# EAGLE board mkr1000_backpack (EAGLE 9.1.0)
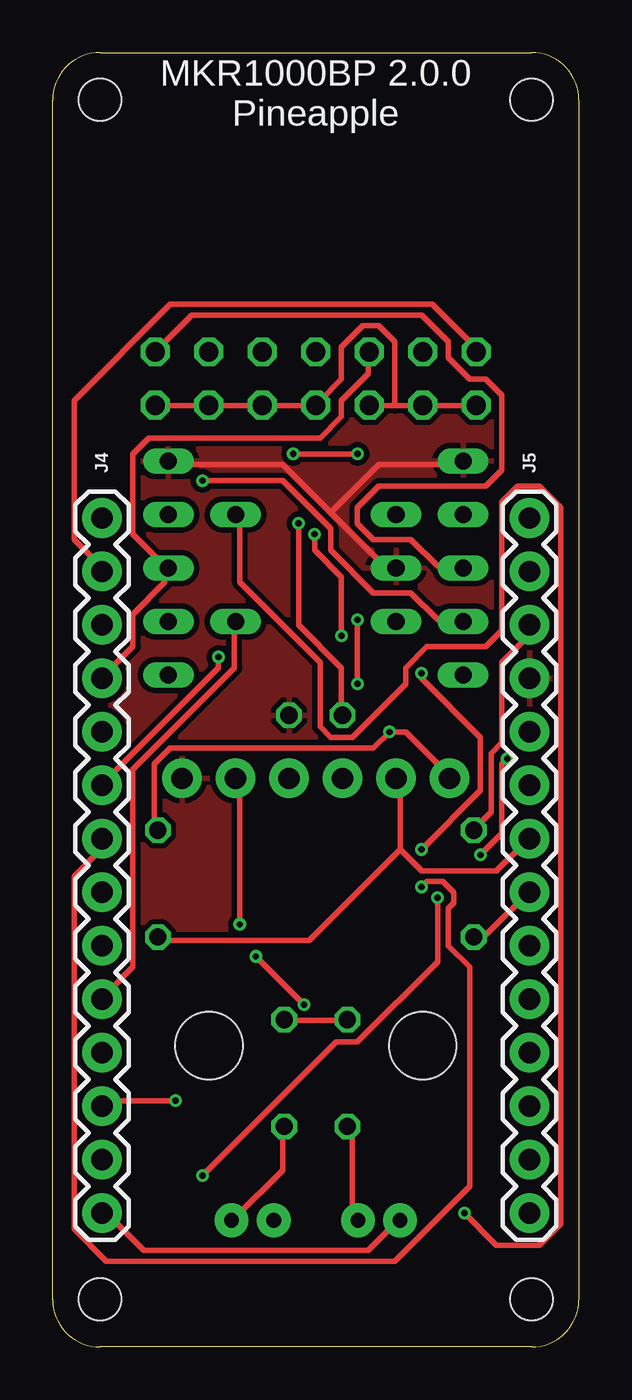
[diagram p0: board, top side]
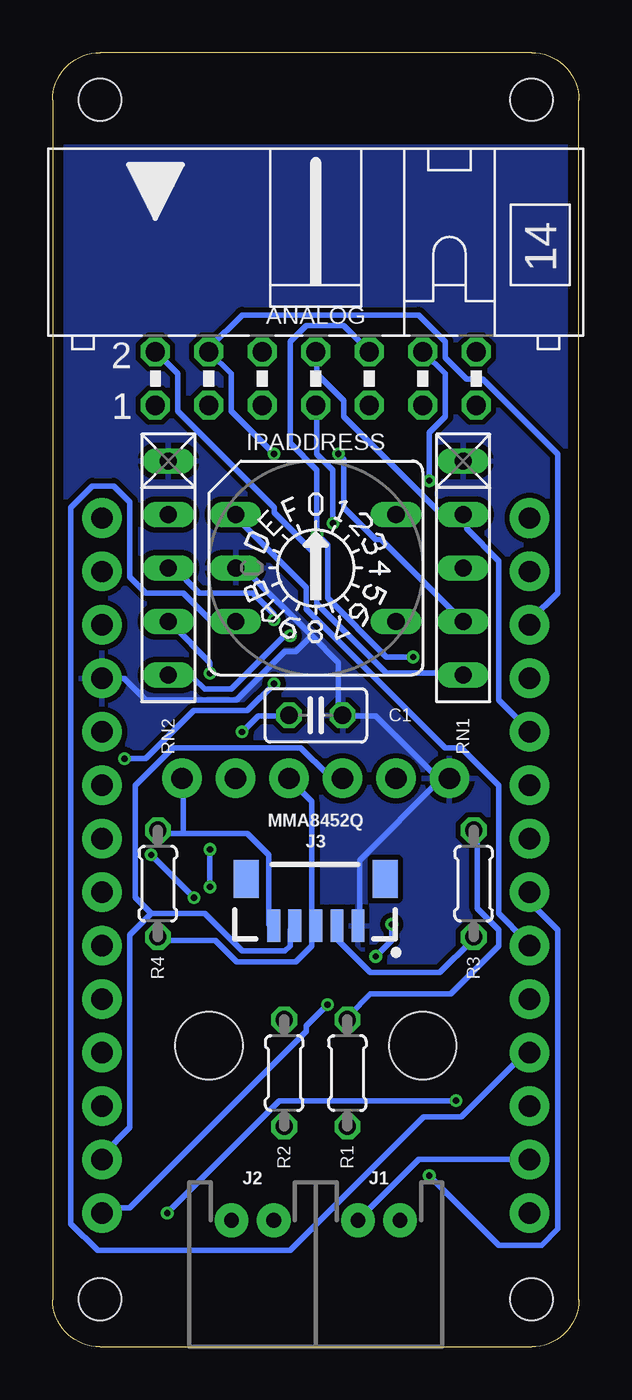
[diagram p1: board, bottom side, seen from below]

Size 25 x 61.5 mm. Coordinates in mm from the lower left corner, seen from the top.
Outline: 0,2.25 0,59.25 arc-90 2.25,61.5 22.75,61.5 arc-90 25,59.25 25,2.25 arc-90 22.75,0 2.25,0 arc-90 0,2.25
Copper layers (1*16): Top 0.035mm / dielectric 1.53mm / Bottom 0.035mm
Design rules "pban_5mil-l2": minimum track width 5mil, minimum drill 0.3mm, track to track 5mil, track to pad 0.229mm, pad to pad 5mil, via to via 5mil, smd to smd 5mil, copper to edge 0.5mm, drill to drill 0.5mm, minimum pad ring 0.15mm, minimum via ring 0.15mm, stop-mask expansion 4mil, vias tented up to drill 0.35mm, thermal gap 10mil
Net classes: 0 default: width 0.254 mm, drill 0.254 mm, clearance 0.254 mm
Holes 2 mm at 2.25,59.26 22.75,59.26 22.75,2.26 2.25,2.26
Holes 3.2 mm at 17.58,14.31 7.42,14.31
bRestrict: area 0.3,57.3 to 4.2,61.2; area 20.8,57.3 to 24.7,61.2; 4 lines

## Footprints (pad centres in the part's own frame; a part is rotated, then mirrored left to right if it is on the bottom)
ML14L = drill 0.914 octagon: 1 -7.62,-1.27; 2 -7.62,1.27; 3 -5.08,-1.27; 4 -5.08,1.27; 5 -2.54,-1.27; 6 -2.54,1.27; 7 0,-1.27; 8 0,1.27; 9 2.54,-1.27; 10 2.54,1.27; 11 5.08,-1.27; 12 5.08,1.27; 13 7.62,-1.27; 14 7.62,1.27
C025-025X050 = drill 0.813 octagon: 1 -1.27,0; 2 1.27,0
A1353HEX = drill 0.813 long: 1 3.81,-2.54; 2 -3.81,2.54; 4 3.81,2.54; 8 -3.81,-2.54; C 3.81,0
JST-2-PTH-NS = drill 0.7 pad 1.6: 1 -1,0; 2 1,0
1X05_1MM = smd 0.6 x 1.55: 1 -2,0; 2 -1,0; 3 0,0; 4 1,0; 5 2,0 | smd 1.2 x 1.8: NC1 -3.3,2.225; NC2 3.3,2.225
1X14 = drill 1.016 pad 1.88: 1 0,0; 2 2.54,0; 3 5.08,0; 4 7.62,0; 5 10.16,0; 6 12.7,0; 7 15.24,0; 8 17.78,0; 9 20.32,0; 10 22.86,0; 11 25.4,0; 12 27.94,0; 13 30.48,0; 14 33.02,0
1X06_NO_SILK = drill 1.016 pad 1.88: 1 0,0; 2 2.54,0; 3 5.08,0; 4 7.62,0; 5 10.16,0; 6 12.7,0
0204/5 = drill 0.813 octagon: 1 -2.54,0; 2 2.54,0
RN-5 = drill 0.813 long: 1 -5.08,0; 2 -2.54,0; 3 0,0; 4 2.54,0; 5 5.08,0

## Placement (x,y rotation side)
ANALOG  [ML14L]  12.5,46.01 0 bottom
C1  0.1u  [C025-025X050]  12.5,30.01 0 bottom
IPADDRESS  [A1353HEX]  12.5,37.01 180 bottom
J1  [JST-2-PTH-NS]  9.5,6.01 180 bottom
J2  [JST-2-PTH-NS]  15.5,6.01 180 bottom
J3  3.3V  [1X05_1MM]  12.5,20.01 0 bottom
J4  DNP  [1X14]  2.34,39.38 270 top
J5  DNP  [1X14]  22.66,6.36 90 top
MMA8452Q  [1X06_NO_SILK]  18.85,27.01 0 bottom
R1  680  [0204/5]  11,13.01 90 bottom
R2  680  [0204/5]  14,13.01 90 bottom
R3  6.8k  [0204/5]  5,22.01 90 bottom
R4  6.8k  [0204/5]  20,22.01 90 bottom
RN1  10k  [RN-5]  5.5,37.01 270 bottom
RN2  10k  [RN-5]  19.5,37.01 270 bottom

## Library data of the parts
ANALOG = con-ml; OC_FARNELL: unknown; OC_NEWARK: unknown
C1 R1-R4 = resistor
IPADDRESS = switch-dil; OC_FARNELL: unknown; OC_NEWARK: unknown
J1 J2 J4 J5 = SparkFun-Connectors
J3 = SparkFun-Connectors; PROD_ID: CONN-08528; SF_ID: GPS-08288
MMA8452Q = SparkFun-Connectors; PROD_ID: CONN-08437
RN1 RN2 = resistor-net; OC_FARNELL: unknown; OC_NEWARK: unknown

## Nets
A0: ANALOG.2 J4.2 RN1.5
A1: ANALOG.4 J4.3 RN1.4
A2: ANALOG.6 J4.4 RN1.3
A3: ANALOG.8 J4.5 RN1.2
A4: ANALOG.10 J4.6 RN2.5
A5: ANALOG.12 J4.7 RN2.4
A6: ANALOG.14 J4.8 RN2.3
D0: IPADDRESS.1 J4.9
D1: IPADDRESS.2 J4.10
D2: IPADDRESS.4 J4.11
D3: IPADDRESS.8 J4.12
D6: J5.1 MMA8452Q.5
D7: J3.2 J5.2 MMA8452Q.4
GND: C1.2 IPADDRESS.C J3.5 J5.11 MMA8452Q.6 RN1.1 RN2.1
N$1: J1.1 R1.1
N$2: J2.1 R2.1
N$3: J1.2 J4.13
N$4: J2.2 J4.14
SCL: J3.3 J5.7 MMA8452Q.3 R4.1
SDA: J3.4 J5.8 MMA8452Q.2 R3.1
VCC: ANALOG.1 ANALOG.3 ANALOG.5 ANALOG.7 ANALOG.9 ANALOG.11 ANALOG.13 C1.1 J3.1 J5.12 MMA8452Q.1 R1.2 R2.2 R3.2 R4.2

## Tracks (layer width: path | path; a pad name or v marks a point on that pad's centre or on a via)
A0
  Top 0.254: J4.2 2.29,37.1 1.02,38.37 1.02,44.97 5.59,49.54 18.03,49.54 20.07,47.51 ANALOG.2
  Bottom 0.254: RN1.5 5.59,32.02 9.14,32.02 12.45,35.32 12.45,37.6 14.48,39.64 14.48,39.89 19.05,44.46 19.05,46.24 20.07,47.26 ANALOG.2
A1  (via drill 0.3)
  Top 0.254: v14.48,42.43 v11.43,42.43
  Bottom 0.254: v11.43,42.43 11.18,42.18 11.18,39.89 9.65,38.37 9.4,38.37 5.59,34.56 RN1.4 | v14.48,42.43 16.51,44.46 16.51,46.24 17.53,47.26 ANALOG.4 17.53,47.51 16,49.03 7.62,49.03 6.35,47.76 6.35,47 5.33,45.99 4.57,45.99 1.02,42.43 1.02,35.83 2.29,34.56 J4.3
A2
  Top 0.254: J4.4 2.54,32.02 3.81,33.29 3.81,34.81 5.33,36.33 5.33,36.84 RN1.3 5.33,37.1 3.81,38.62 3.81,42.43 4.57,43.19 12.7,43.19 13.72,44.21 13.72,44.97 14.99,46.24 14.99,47.26 ANALOG.6
A3
  Bottom 0.254: J4.5 2.54,29.48 3.81,30.75 3.81,37.35 5.33,38.87 5.33,39.38 RN1.2 5.59,39.64 6.6,39.64 11.18,44.21 11.18,44.97 12.45,46.24 12.45,47.26 ANALOG.8
A4  (via drill 0.3)
  Top 0.254: v13.72,33.79 13.72,36.59 12.45,37.86 v12.45,38.62 | v7.87,32.78 7.87,32.27 2.54,26.94 J4.6
  Bottom 0.254: v13.72,33.79 13.97,33.79 16.51,31.25 17.78,31.25 18.29,31.76 19.3,31.76 RN2.5 | ANALOG.10 10.16,47.51 11.18,48.53 12.95,48.53 13.72,47.76 13.72,42.94 12.45,41.67 v12.45,38.62 11.94,38.11 11.94,35.57 9.14,32.78 v7.87,32.78
A5  (via drill 0.3)
  Top 0.254: v7.11,41.16 10.92,41.16 13.21,38.87 13.21,37.86 15.24,35.83 17.02,35.83 18.29,34.56 19.3,34.56 RN2.4 | v17.53,21.86 17.78,22.11 18.54,22.11 19.05,21.6 19.05,21.09 18.8,20.84 18.8,19.06 19.81,18.05 19.81,7.63 16.26,4.08 2.54,4.08 1.02,5.6 1.02,22.36 2.29,23.63 2.29,24.14 J4.7 | v17.53,23.63 20.32,26.43 20.32,28.97 17.53,31.76 v17.53,32.02
  Bottom 0.254: v7.11,41.16 7.11,43.45 6.35,44.21 6.35,46.24 7.37,47.26 ANALOG.12 | v17.53,23.63 v17.53,21.86 | v17.53,32.02 17.53,32.52 19.3,34.3 RN2.4
A6  (via drill 0.3)
  Top 0.254: RN2.3 19.3,37.1 18.29,37.1 17.02,38.37 15.24,38.37 14.48,39.13 14.48,39.89 15.49,40.91 20.57,40.91 21.34,41.67 21.34,45.22 20.57,45.99 19.81,45.99 18.8,47 18.8,47.76 17.53,49.03 6.6,49.03 5.08,47.51 ANALOG.14 | v7.11,8.14 13.46,14.49 14.48,14.49 18.29,18.3 v18.29,21.35 | v20.32,23.38 21.34,24.4 21.34,27.7 v21.59,27.95 | v14.48,34.56 v14.48,31.51
  Bottom 0.254: v7.11,8.14 3.81,4.84 1.78,4.84 1.02,5.6 1.02,19.82 2.29,21.09 2.29,21.6 J4.8 | v20.32,23.38 v18.29,21.35 | v21.59,27.95 20.57,27.95 18.29,30.24 15.75,30.24 v14.48,31.51 | v14.48,34.56 14.48,34.81 15.49,35.83 18.03,35.83 19.3,37.1 RN2.3
D0
  Bottom 0.254: IPADDRESS.1 16.26,39.38 12.95,36.08 12.95,35.06 6.35,28.46 5.59,28.46 3.81,26.68 3.81,20.59 2.54,19.32 J4.9
D1
  Top 0.254: IPADDRESS.2 8.64,34.3 8.64,32.27 3.81,27.44 3.81,18.05 2.54,16.78 J4.10
D2
  Bottom 0.254: IPADDRESS.4 16.51,34.56 17.53,34.56 18.8,35.83 20.57,35.83 21.34,36.59 21.34,40.14 22.1,40.91 23.11,40.91 24.13,39.89 24.13,5.85 22.86,4.58 13.72,4.58 7.37,10.93 5.59,10.93 2.54,13.98 J4.11
D3  (via drill 0.3)
  Top 0.254: v19.56,6.36 21.08,4.84 23.11,4.84 24.13,5.85 24.13,39.89 23.11,40.91 22.1,40.91 21.34,40.14 21.34,34.05 20.57,33.29 17.78,33.29 16.76,32.27 16.76,31.51 14.22,28.97 13.21,28.97 12.7,29.48 12.7,32.52 8.89,36.33 8.89,39.38 IPADDRESS.8 | v5.84,11.7 2.54,11.7 J4.12
  Bottom 0.254: v19.56,6.36 14.22,11.7 v5.84,11.7
D6  (via drill 0.3)
  Top 0.254: v8.89,20.08 8.89,26.94 MMA8452Q.5 | v11.94,16.27 v9.65,18.55
  Bottom 0.254: v8.89,20.08 8.89,19.32 v9.65,18.55 | v11.94,16.27 12.95,15.25 12.95,15 21.34,6.62 22.61,6.62 J5.1
D7
  Bottom 0.254: 20.32,20.59 17.78,20.59 16,18.81 13.97,18.81 13.72,19.06 13.72,19.82 J3.2 | 20.32,20.59 21.34,19.57 21.34,10.43 22.61,9.16 J5.2 | 20.32,20.59 21.08,21.35 21.08,26.68 19.3,28.46 13.21,28.46 11.94,27.19 11.43,27.19 MMA8452Q.4
GND
  Top 0.254: 13.21,39.64 15.75,37.1 16.26,37.1 IPADDRESS.C | 13.21,39.64 10.92,41.92 5.59,41.92 RN1.1 | 13.21,39.64 15.49,41.92 19.3,41.92 RN2.1
  Bottom 0.254: 6.6,26.94 6.35,27.19 MMA8452Q.6 6.6,26.94 | 6.6,26.94 10.41,23.13 10.41,20.08 J3.5 | 6.6,26.94 9.65,29.98 11.18,29.98 C1.2 11.43,30.24 11.43,32.52 12.7,33.79 | 12.7,33.79 15.75,36.84 16.26,36.84 IPADDRESS.C | 12.7,33.79 13.46,33.03 13.97,33.03 16.26,30.75 20.57,30.75 21.59,31.76 22.61,31.76 J5.11
  pour Top: 0,3.01 25,3.01 25,57.01 0,57.01
  pour Bottom: 0,3.01 25,3.01 25,57.01 0,57.01
N$1
  Top 0.254: R1.1 10.92,10.43 10.92,8.39 8.64,6.11 J1.1
N$2
  Top 0.254: R2.1 14.22,10.43 14.22,6.36 14.48,6.11 J2.1
N$3
  Bottom 0.254: J1.2 10.41,6.11 7.62,8.9 2.54,8.9 J4.13
N$4
  Top 0.254: J2.2 16.26,5.85 14.99,4.58 4.32,4.58 2.54,6.36 J4.14
SCL
  Top 0.254: R4.1 20.07,19.57 20.57,19.57 22.61,21.6 J5.7
  Bottom 0.254: MMA8452Q.3 13.72,26.94 12.7,25.92 12.7,20.08 J3.3 12.7,19.82 12.7,19.06 13.46,18.3 16.26,18.3 17.27,19.32 19.81,19.32 R4.1
SDA
  Top 0.254: 16.51,23.63 16.51,26.94 MMA8452Q.2 | 16.51,23.63 17.53,22.62 21.08,22.62 22.61,24.14 J5.8 | 16.51,23.63 12.19,19.32 5.08,19.32 R3.1
  Bottom 0.254: J3.4 11.43,19.82 11.43,19.32 9.91,17.79 6.6,17.79 5.08,19.32 R3.1
VCC  (via drill 0.3)
  Top 0.254: 16.26,44.72 17.53,44.72 ANALOG.3 17.78,44.72 20.07,44.72 ANALOG.1 | 16.26,44.72 15.24,44.72 ANALOG.5 | ANALOG.13 5.08,44.72 7.37,44.72 ANALOG.11 7.62,44.72 9.91,44.72 ANALOG.9 10.16,44.72 12.45,44.72 ANALOG.7 12.7,44.97 13.72,45.99 13.72,47.51 14.73,48.53 15.49,48.53 16.26,47.76 16.26,44.72 | R1.2 11.18,15.51 13.97,15.51 R2.2 | MMA8452Q.1 18.8,27.19 16.76,29.22 v16,29.22 15.24,28.46 5.59,28.46 4.83,27.7 4.83,24.65 R3.2 | J5.12 22.61,34.3 22.61,33.79 21.34,32.52 21.34,28.71 20.83,28.21 20.83,25.41 20.07,24.65 R4.2 | v11.68,39.13 11.68,34.3 13.72,32.27 13.72,30.24 C1.1
  Bottom 0.254: R3.2 4.83,24.4 4.83,20.84 3.81,19.82 3.81,19.06 6.1,16.78 9.91,16.78 10.92,15.76 R1.2 | v16,29.22 15.24,29.98 13.97,29.98 C1.1 | 18.8,24.4 19.81,24.4 R4.2 | 18.8,24.4 15.75,24.4 14.73,23.38 14.73,20.08 J3.1 | 18.8,24.4 18.8,26.94 MMA8452Q.1 | v11.68,39.13 11.68,41.67 12.45,42.43 12.45,44.72 ANALOG.7

## Text on the board
tNames: MKR1000BP 2.0.0 / Pineapple